# Altium PCB imu_analog.PcbDoc
Units mil, origin at the board's own origin, x right, y up, seen from the top; angles counter-clockwise.
Board outline 2000 x 2000 mil, 2 copper layers (Top Layer, Bottom Layer); 144 components, 100 nets, 489 pads, 36 vias.
Unrouted connection lines stored in the file: 322.
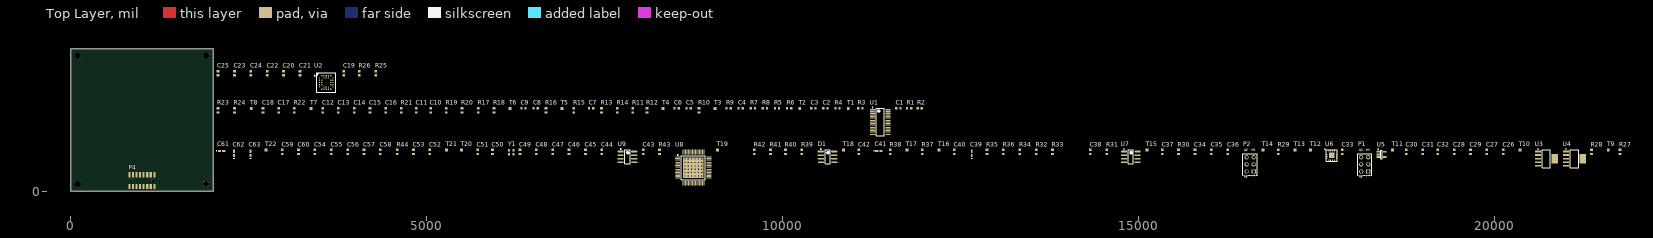
[diagram p0: Top Layer view]
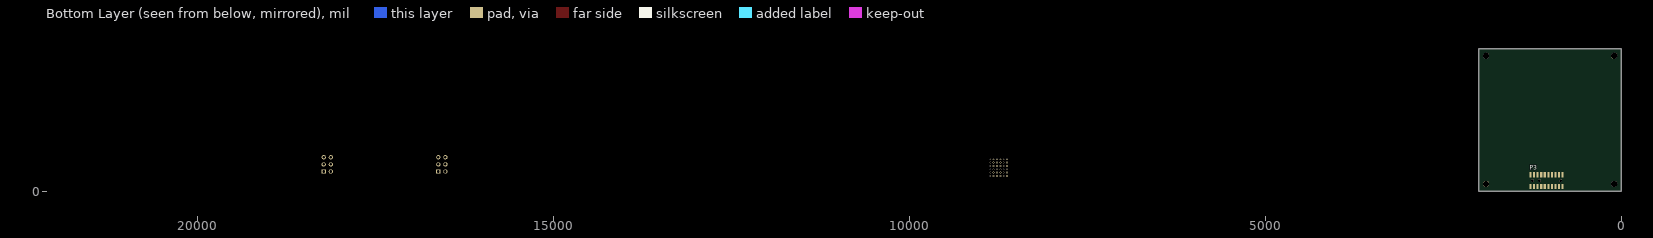
[diagram p1: Bottom Layer view, seen from below]

## Layer stack, top to bottom
Top Layer: signal copper 1.4
Dielectric: dielectric 12.6, FR-4, Dk 4.8
Bottom Layer: signal copper 1.4

## Board outline
0,0 2000,0 2000,2000 0,2000

## Design rules (kind name [scope] priority, off if disabled: settings)
Clearance [All] p1: gap=10
PolygonConnect [All] p1: connectstyle=Relief reliefconductorwidth=10 reliefentries=4 polygonreliefangle="90 Angle"
RoomDefinition U_gyro [InComponentClass('U_gyro')] p1: confinementstyle=ConfineIn formatcopy=TRUE lockcomponents=FALSE outline 2045,1340 4455,1340 4455,1810 2045,1810
RoomDefinition U_differential_op_amps [InComponentClass('U_differential_op_amps')] p2: confinementstyle=ConfineIn formatcopy=TRUE lockcomponents=FALSE outline 2045,760 12005,760 12005,1290 2045,1290
RoomDefinition imu_analog [InComponentClass('imu_analog')] p3: confinementstyle=ConfineIn formatcopy=TRUE lockcomponents=FALSE outline 2045,55 21930,55 21930,705 2045,705
RoutingVias [All] p1: holewidth=28 width=50 viastyle="Through Hole" minholewidth=28 minwidth=50 maxholewidth=28 maxwidth=50
SilkscreenOverComponentPads [All] p1: minsilkscreentomaskgap=10
SolderMaskExpansion [All] p1: expansion=4
Width [All] p1: maxlimit=10 minlimit=10 preferedwidth=10
27 further rules are at their usual default settings.

## Classes and differential pairs
net class FLTR_P_D[1..2]: FLTR_P_D1 FLTR_P_D2
net class FLTR_P_C[1..2]: FLTR_P_C1 FLTR_P_C2
net class FLTR_P_B[1..2]: FLTR_P_B1 FLTR_P_B2
net class FLTR_P_A[1..2]: FLTR_P_A1 FLTR_P_A2
net class FLTR_N_D[1..2]: FLTR_N_D1 FLTR_N_D2
net class FLTR_N_C[1..2]: FLTR_N_C1 FLTR_N_C2
net class FLTR_N_B[1..2]: FLTR_N_B1 FLTR_N_B2
net class FLTR_N_A[1..2]: FLTR_N_A1 FLTR_N_A2
net class FLTR_IN_D[1..2]: FLTR_IN_D1 FLTR_IN_D2
net class FLTR_IN_C[1..2]: FLTR_IN_C1 FLTR_IN_C2
net class FLTR_IN_B[1..2]: FLTR_IN_B1 FLTR_IN_B2
net class FLTR_IN_A[1..2]: FLTR_IN_A1 FLTR_IN_A2
component class U_gyro: C19 C20 C21 C22 C23 C24 C25 R25 R26 U2
component class U_differential_op_amps: C1 C2 C3 C4 C5 C6 C7 C8 C9 C10 C11 C12 C13 C14 C15 C16 C17 C18 R1 R2 R3 R4 R5 R6 R7 R8 R9 R10 R11 R12 R13 R14 R15 R16 R17 R18 R19 R20 R21 R22 R23 R24 T1 T2 T3 T4 T5 T6 T7 T8 U1
component class imu_analog: C26 C27 C28 C29 C30 C31 C32 C33 C34 C35 C36 C37 C38 C39 C40 C41 C42 C43 C44 C45 C46 C47 C48 C49 C50 C51 C52 C53 C54 C55 C56 C57 C58 C59 C60 C61 C62 C63 D1 P1 P2 P3 P4 R27 R28 R29 R30 R31 R32 R33 R34 R35 R36 R37 R38 R39 R40 R41 R42 R43 R44 T9 T10 T11 T12 T13 T14 T15 T16 T17 T18 T19 T20 T21 T22 U3 U4 U5 U6 U7 U8 U9 Y1

## Components (designator, comment, footprint, x,y, rotation, side; value= is the part's Value field where it differs from the comment)
C1 "Capacitor" "0603 (1608)" 11625,1165 r0 top
C2 "Capacitor" "0603 (1608)" 10600,1165 r0 top
C3 "Capacitor" "0603 (1608)" 10430,1165 r0 top
C4 "Capacitor" "0603 (1608)" 9410,1165 r0 top
C5 "Capacitor" "0603 (1608)" 8680,1165 r0 top
C6 "Capacitor" "0603 (1608)" 8510,1165 r0 top
C7 "Capacitor" "0603 (1608)" 7310,1165 r0 top
C8 "Capacitor" "0603 (1608)" 6530,1165 r0 top
C9 "Capacitor" "0603 (1608)" 6360,1165 r0 top
C10 "Capacitor" "0603 (1608)" 5055,1135 r90 top
C11 "Capacitor" "0603 (1608)" 4855,1135 r90 top
C12 "Capacitor" "0603 (1608)" 3540,1135 r90 top
C13 "Capacitor" "0603 (1608)" 3760,1135 r90 top
C14 "Capacitor" "0603 (1608)" 3985,1135 r90 top
C15 "Capacitor" "0603 (1608)" 4205,1135 r90 top
C16 "Capacitor" "0603 (1608)" 4425,1135 r90 top
C17 "Capacitor" "0603 (1608)" 2920,1135 r90 top
C18 "Capacitor" "0603 (1608)" 2700,1135 r90 top
C19 "Capacitor" "0603 (1608)" 3835,1655 r90 top
C20 "Capacitor" "0603 (1608)" 2990,1655 r90 top
C21 "Capacitor" "0603 (1608)" 3220,1655 r90 top
C22 "Capacitor" "0603 (1608)" 2760,1655 r90 top
C23 "Capacitor" "0603 (1608)" 2300,1655 r90 top
C24 "Capacitor" "0603 (1608)" 2530,1655 r90 top
C25 "Capacitor" "0603 (1608)" 2070,1655 r90 top
C26 "1uF" "0603 (1608)" 20120,550 r90 top
C27 "Capacitor" "0603 (1608)" 19890,550 r90 top
C28 "10uF" "0603 (1608)" 19430,550 r90 top
C29 "10uF" "0603 (1608)" 19660,550 r90 top
C30 "1uF" "0603 (1608)" 18760,550 r90 top
C31 "Capacitor" "0603 (1608)" 18990,550 r90 top
C32 "Capacitor" "0603 (1608)" 19200,550 r90 top
C33 "Capacitor" "0603 (1608)" 17860,550 r90 top
C34 "10nF" "0603 (1608)" 15790,550 r90 top
C35 "10nF" "0603 (1608)" 16020,550 r90 top
C36 "10nF" "0603 (1608)" 16250,550 r90 top
C37 "Capacitor" "0603 (1608)" 15330,550 r90 top
C38 "10nF" "0603 (1608)" 14320,550 r90 top
C39 "tant" "CAP-POL 0603(1608)" 12655,530 r90 top
C40 "Capacitor" "0603 (1608)" 12410,550 r90 top
C41 "tant" "CAP-POL 0603(1608)" 11350,565 r0 top
C42 "Capacitor" "0603 (1608)" 11070,550 r90 top
C43 "10nF" "0603 (1608)" 8040,550 r90 top
C44 "Capacitor" "0603 (1608)" 7460,550 r90 top
C45 "Capacitor" "0603 (1608)" 7230,550 r90 top
C46 "Capacitor" "0603 (1608)" 7000,550 r90 top
C47 "Capacitor" "0603 (1608)" 6770,550 r90 top
C48 "Capacitor" "0603 (1608)" 6540,550 r90 top
C49 "Capacitor" "0603 (1608)" 6310,550 r90 top
C50 "Capacitor" "0603 (1608)" 5925,550 r90 top
C51 "Capacitor" "0603 (1608)" 5715,550 r90 top
C52 "Capacitor" "0603 (1608)" 5045,550 r90 top
C53 "10nF" "0603 (1608)" 4815,550 r90 top
C54 "Capacitor" "0603 (1608)" 3430,550 r90 top
C55 "Capacitor" "0603 (1608)" 3660,550 r90 top
C56 "Capacitor" "0603 (1608)" 3890,550 r90 top
C57 "Capacitor" "0603 (1608)" 4120,550 r90 top
C58 "Capacitor" "0603 (1608)" 4350,550 r90 top
C59 "Capacitor" "0603 (1608)" 2970,550 r90 top
C60 "Capacitor" "0603 (1608)" 3200,550 r90 top
C61 "tant" "CAP-POL 0603(1608)" 2120,565 r0 top
C62 "tant" "CAP-POL 0603(1608)" 2295,530 r90 top
C63 "tant" "CAP-POL 0603(1608)" 2525,530 r90 top
D1 "2.5V Ref" SOIC-8 10630,480 r0 top
P1 "Header 3X2A" HDR2X3_CEN 18225,275 r90 top
P2 "Header 3X2A" HDR2X3_CEN 16615,275 r90 top
P3 "MHDR2X10" S9013E-10-ND 1050,147 r0 bottom locked
P4 "2x8smd0.5male" S9007E-08-ND 1000,147 r0 top locked
R1 "931 1%" "0603 (1608)" 11775,1165 r0 top
R2 "931 1%" "0603 (1608)" 11925,1165 r0 top
R3 "931 1%" "0603 (1608)" 11090,1165 r0 top
R4 "931 1%" "0603 (1608)" 10770,1165 r0 top
R5 "931 1%" "0603 (1608)" 9920,1165 r0 top
R6 "931 1%" "0603 (1608)" 10090,1165 r0 top
R7 "931 1%" "0603 (1608)" 9580,1165 r0 top
R8 "931 1%" "0603 (1608)" 9750,1165 r0 top
R9 "931 1%" "0603 (1608)" 9240,1165 r0 top
R10 "931 1%" "0603 (1608)" 8825,1135 r90 top
R11 "931 1%" "0603 (1608)" 7895,1135 r90 top
R12 "931 1%" "0603 (1608)" 8095,1135 r90 top
R13 "931 1%" "0603 (1608)" 7455,1135 r90 top
R14 "931 1%" "0603 (1608)" 7675,1135 r90 top
R15 "931 1%" "0603 (1608)" 7065,1135 r90 top
R16 "931 1%" "0603 (1608)" 6675,1135 r90 top
R17 "931 1%" "0603 (1608)" 5725,1135 r90 top
R18 "931 1%" "0603 (1608)" 5945,1135 r90 top
R19 "931 1%" "0603 (1608)" 5275,1135 r90 top
R20 "931 1%" "0603 (1608)" 5495,1135 r90 top
R21 "931 1%" "0603 (1608)" 4645,1135 r90 top
R22 "931 1%" "0603 (1608)" 3140,1135 r90 top
R23 "931 1%" "0603 (1608)" 2070,1135 r90 top
R24 "931 1%" "0603 (1608)" 2300,1135 r90 top
R25 "ST Jumper" "0603 (1608)" 4285,1655 r90 top
R26 "ST Jumper" "0603 (1608)" 4055,1655 r90 top
R27 "1K" "0603 (1608)" 21760,550 r90 top
R28 "20K" "0603 (1608)" 21360,550 r90 top
R29 "ST Jumper" "0603 (1608)" 16960,550 r90 top
R30 "1K" "0603 (1608)" 15560,550 r90 top
R31 "20K" "0603 (1608)" 14550,550 r90 top
R32 "100" "0603 (1608)" 13560,550 r90 top
R33 "Res1" "0603 (1608)" 13790,550 r90 top
R34 "1K" "0603 (1608)" 13330,550 r90 top
R35 "100" "0603 (1608)" 12870,550 r90 top
R36 "Res1" "0603 (1608)" 13100,550 r90 top
R37 "Res1" "0603 (1608)" 11960,550 r90 top
R38 "Res1" "0603 (1608)" 11510,550 r90 top
R39 "Res1" "0603 (1608)" 10270,550 r90 top
R40 "Res1" "0603 (1608)" 10040,550 r90 top
R41 "Res1" "0603 (1608)" 9830,550 r90 top
R42 "Res1" "0603 (1608)" 9600,550 r90 top
R43 "100" "0603 (1608)" 8270,550 r90 top
R44 "931 1%" "0603 (1608)" 4585,550 r90 top
T1 "" TEST_PAD 10920,1160 r0 top
T2 "" TEST_PAD 10240,1160 r0 top
T3 "" TEST_PAD 9050,1160 r0 top
T4 "" TEST_PAD 8320,1160 r0 top
T5 "" TEST_PAD 6900,1160 r0 top
T6 "" TEST_PAD 6170,1160 r0 top
T7 "" TEST_PAD 3375,1160 r0 top
T8 "" TEST_PAD 2535,1160 r0 top
T9 "TEST_PAD" TEST_PAD 21595,575 r0 top
T10 "TEST_PAD" TEST_PAD 20355,575 r90 top
T11 "TEST_PAD" TEST_PAD 18565,575 r90 top
T12 "" TEST_PAD 17415,575 r90 top
T13 "" TEST_PAD 17195,575 r90 top
T14 "" TEST_PAD 16745,575 r90 top
T15 "" TEST_PAD 15115,575 r90 top
T16 "" TEST_PAD 12195,575 r90 top
T17 "" TEST_PAD 11745,575 r90 top
T18 "" TEST_PAD 10855,575 r90 top
T19 "" TEST_PAD 9085,575 r90 top
T20 "" TEST_PAD 5490,575 r90 top
T21 "" TEST_PAD 5280,575 r90 top
T22 "TEST_PAD" TEST_PAD 2745,575 r90 top
U1 "THS4524" TSSOP-38 11370,970 r0 top
U2 "ADXRS620" BGA_AXDR 3590,1525 r0 top
U3 "3.3V Reg MCP1791T-3302E" "SOT223 - 5 leads + tab" 20725,455 r0 top
U4 "5V Reg - MCP1791T-5002E" "SOT223 - 5 leads + tab" 21120,455 r0 top
U5 "1.8V Reg MCP1804" "SOT23-5 - MCP1804T" 18410,515 r0 top
U6 "ADXL325" LFCSP_LQ_AXDL 17710,500 r0 top
U7 "OPA350" MSOP-8 14890,480 r0 top
U8 "ADS1178/1278" S-PQFP-G64 8745,330 r0 top
U9 "OPA350" MSOP-8 7820,480 r0 top
Y1 "OSCILLATOR" "ABRACON Oscillator" 6155,515 r0 top

## Footprints (in the part's own frame and the unit in brackets; to place one, negate y for a bottom-side part, rotate by r counter-clockwise, add the part's x,y. Pads: shape width x height; smd on the part's side, far side on the other; paste and mask are expansions set on the pad)
"0603 (1608)" [mm] "Chip 2-Leads 0603 (1608)"
  rect 0.8x0.95 smd mask+0: 1(-0.75,0) 2(0.75,0)
  body extent -0.77,-0.43 0.77,0.43, height 0.55
"ABRACON Oscillator" [mm]
  rect 0.65x0.85 smd: 1(0,0) 2(1.65,0) 3(1.65,1.55) 4(0,1.55)
  body extent -0.48,-0.36 2.2,1.91, height 0.85
BGA_AXDR [mm] "From AXDRS622 Datasheet"
  round 0.45 smd: A2(-1.6,2.4) A3(-0.8,2.4) A4(0,2.4) A5(0.8,2.4) A6(1.6,2.4) B1(-2.4,1.6) B3(-0.8,1.6) B4(0,1.6) B5(0.8,1.6) B7(2.4,1.6) C1(-2.4,0.8) C2(-1.6,0.8) C6(1.6,0.8) C7(2.4,0.8) D1(-2.4,0) D2(-1.6,0) D6(1.6,0) D7(2.4,0) E1(-2.4,-0.8) E2(-1.6,-0.8) E6(1.6,-0.8) E7(2.4,-0.8) F1(-2.4,-1.6) F3(-0.8,-1.6) F4(0,-1.6) F5(0.8,-1.6) F7(2.4,-1.6) G2(-1.6,-2.4) G3(-0.8,-2.4) G4(0,-2.4) G5(0.8,-2.4) G6(1.6,-2.4)
  silkscreen extent -4.22,-3.45 3.45,3.45, body extent -3.45,-3.45 3.45,3.45, height 3.8
"CAP-POL 0603(1608)" [mm] "Molded Capacitor, 2-Leads, Body 1.6x0.8mm, IPC Medium Density"
  rect 1.2x0.65 smd: 1(-0.775,0) 2(0.775,0)
  silkscreen extent -1.68,-0.22 -1.68,0.23, body extent -0.85,-0.48 0.85,0.48, height 0.9
HDR2X3_CEN [mm] "Connector; Header; 3x2 Position"
  rect 1.5x1.5 hole 0.9: 1(0,0)
  round 1.5 hole 0.9: 2(2.54,0) 3(5.08,0) 4(0,2.54) 5(2.54,2.54) 6(5.08,2.54)
  silkscreen extent -1.27,-1.27 6.35,3.81
LFCSP_LQ_AXDL [mm]
  rect 0.5x0.35 smd mask+0.102: 1(-1.75,0.975) 2(-1.75,0.325) 3(-1.75,-0.325) 4(-1.75,-0.975) 9(1.75,-0.975) 10(1.75,-0.325) 11(1.75,0.325) 12(1.75,0.975)
  rect 0.35x0.5 smd mask+0.102: 5(-0.975,-1.75) 6(-0.325,-1.75) 7(0.325,-1.75) 8(0.975,-1.75) 13(0.975,1.75) 14(0.325,1.75) 15(-0.325,1.75) 16(-0.975,1.75)
  rect 1.95x1.95 smd: PAD(0,0)
  silkscreen extent -2.37,-2 2,2.37
MSOP-8 [mm] "MSOP-8 From OPA350 datasheet"
  oval 2.2x0.6 smd: 1(-2.425,1.905) 2(-2.425,0.635) 3(-2.425,-0.635) 4(-2.425,-1.905) 5(2.425,-1.905) 6(2.425,-0.635) 7(2.425,0.635) 8(2.425,1.905)
  silkscreen extent -2.55,-2.5 0.93,2.88, body extent -2,-2.5 2,2.5, height 1.75
S9007E-08-ND [mm] "16 0.05\" smd header - female"
  round 0.9 hole 0.9: 0(-3.81,0) 0(3.81,0)
  rect 0.74x1.85 smd: 1(-4.445,2.125) 2(-4.445,-2.125) 3(-3.175,2.125) 4(-3.175,-2.125) 5(-1.905,2.125) 6(-1.905,-2.125) 7(-0.635,2.125) 8(-0.635,-2.125) 9(0.635,2.125) 10(0.635,-2.125) 11(1.905,2.125) 12(1.905,-2.125) 13(3.175,2.125) 14(3.175,-2.125) 15(4.445,2.125) 16(4.445,-2.125)
S9013E-10-ND [mm] "20-POS Header SMD"
  round 0.9 hole 0.9: 0(-5.08,0) 0(5.08,0)
  rect 0.74x1.85 smd: 1(-5.715,2.125) 2(-5.715,-2.125) 3(-4.445,2.125) 4(-4.445,-2.125) 5(-3.175,2.125) 6(-3.175,-2.125) 7(-1.905,2.125) 8(-1.905,-2.125) 9(-0.635,2.125) 10(-0.635,-2.125) 11(0.635,2.125) 12(0.635,-2.125) 13(1.905,2.125) 14(1.905,-2.125) 15(3.175,2.125) 16(3.175,-2.125) 17(4.445,2.125) 18(4.445,-2.125) 19(5.715,2.125) 20(5.715,-2.125)
S-PQFP-G64 [mm] "ADS1178 Footprint"
  oval 1.75x0.3 smd: 1(-5.575,3.75) 2(-5.575,3.25) 3(-5.575,2.75) 4(-5.575,2.25) 5(-5.575,1.75) 6(-5.575,1.25) 7(-5.575,0.75) 8(-5.575,0.25) 9(-5.575,-0.25) 10(-5.575,-0.75) 11(-5.575,-1.25) 12(-5.575,-1.75) 13(-5.575,-2.25) 14(-5.575,-2.75) 15(-5.575,-3.25) 16(-5.575,-3.75) 33(5.575,-3.75) 34(5.575,-3.25) 35(5.575,-2.75) 36(5.575,-2.25) 37(5.575,-1.75) 38(5.575,-1.25) 39(5.575,-0.75) 40(5.575,-0.25) 41(5.575,0.25) 42(5.575,0.75) 43(5.575,1.25) 44(5.575,1.75) 45(5.575,2.25) 46(5.575,2.75) 47(5.575,3.25) 48(5.575,3.75)
  oval 0.3x1.75 smd: 17(-3.75,-5.575) 18(-3.25,-5.575) 19(-2.75,-5.575) 20(-2.25,-5.575) 21(-1.75,-5.575) 22(-1.25,-5.575) 23(-0.75,-5.575) 24(-0.25,-5.575) 25(0.25,-5.575) 26(0.75,-5.575) 27(1.25,-5.575) 28(1.75,-5.575) 29(2.25,-5.575) 30(2.75,-5.575) 31(3.25,-5.575) 32(3.75,-5.575) 49(3.75,5.575) 50(3.25,5.575) 51(2.75,5.575) 52(2.25,5.575) 53(1.75,5.575) 54(1.25,5.575) 55(0.75,5.575) 56(0.25,5.575) 57(-0.25,5.575) 58(-0.75,5.575) 59(-1.25,5.575) 60(-1.75,5.575) 61(-2.25,5.575) 62(-2.75,5.575) 63(-3.25,5.575) 64(-3.75,5.575)
  rect 7.3x7.3 smd: 65(0,0)
  silkscreen extent -5.7,-4.3 4.3,4.57, body extent -5,-5 5,5, height 1.2
SOIC-8 [mm] "SOIC, 8-Leads, Body 5.0x4.0mm (max), Pitch 1.27mm, IPC Medium Density"
  oval 2.2x0.6 smd: 1(-2.4,1.905) 2(-2.4,0.635) 3(-2.4,-0.635) 4(-2.4,-1.905) 5(2.4,-1.905) 6(2.4,-0.635) 7(2.4,0.635) 8(2.4,1.905)
  silkscreen extent -2.52,-2.5 0.9,2.88, body extent -2,-2.5 2,2.5, height 1.75
"SOT23-5 - MCP1804T" [mm] "SOT23, 5-Leads, Body 3.1x3.2mm (max), Pitch 0.95mm, IPC Medium Density"
  rect 1.15x0.6 smd: 1(-1.175,0.95) 2(-1.175,0) 3(-1.175,-0.95) 4(1.175,-0.95) 5(1.175,0.95)
  silkscreen extent -1.3,-1.55 0.2,1.92, body extent -0.9,-1.55 0.9,1.55, height 1.45
"SOT223 - 5 leads + tab" [mm] "MCP1791T-5002E/DCCT-ND Body 6.6x7.3mm (max), Pitch 1.27mm, IPC Medium Density"
  rect 2.2x0.65 smd: 1(-3,2.54) 2(-3,1.27) 3(-3,0) 4(-3,-1.27) 5(-3,-2.54)
  rect 2.2x3.3 smd: 6(3,0)
  silkscreen extent -3.12,-3.27 1.5,3.54, body extent -1.78,-3.27 1.78,3.27, height 1.8
TEST_PAD [mm]
  rect 1x1 smd: 0(0,0)
TSSOP-38 [mm] "THS4524"
  oval 1.75x0.3 smd: 1(-2.775,4.5) 2(-2.775,4) 3(-2.775,3.5) 4(-2.775,3) 5(-2.775,2.5) 6(-2.775,2) 7(-2.775,1.5) 8(-2.775,1) 9(-2.775,0.5) 10(-2.775,0) 11(-2.775,-0.5) 12(-2.775,-1) 13(-2.775,-1.5) 14(-2.775,-2) 15(-2.775,-2.5) 16(-2.775,-3) 17(-2.775,-3.5) 18(-2.775,-4) 19(-2.775,-4.5) 20(2.775,-4.5) 21(2.775,-4) 22(2.775,-3.5) 23(2.775,-3) 24(2.775,-2.5) 25(2.775,-2) 26(2.775,-1.5) 27(2.775,-1) 28(2.775,-0.5) 29(2.775,0) 30(2.775,0.5) 31(2.775,1) 32(2.775,1.5) 33(2.775,2) 34(2.775,2.5) 35(2.775,3) 36(2.775,3.5) 37(2.775,4) 38(2.775,4.5)
  silkscreen extent -2.9,-4.9 1.5,5.32, body extent -2.15,-4.9 2.15,4.9, height 1.2

## Part data
C26 C28 C29 C30 C34 C35 C36 C38 C43 C53: library part Capacitor
C39 C41 C61 C62 C63: library part "Cap Pol3", "Polarized Capacitor (Surface Mount)"
C45 C46 C47 C48 C49 C50 C51 C52: "COG Ceramic Cap -> near input to ads1178"
D1: library part ZENER, "REF1004 - 2.5 volt ref"
P1 P2: "Header, 3-Pin, Dual row"
P3: "Header, 10-Pin, Female"
R1 R2 R3 R4 R5 R6 R7 R8 R9 R10 R11 R12 R13 R14 R15 R16 R17 R18 R19 R20 R21 R22 R23 R24 R25 R26 R27 R28 R29 R30 R31 R32 R34 R35 R43 R44: library part Res1, "Resistor"
R33 R36 R37 R38 R39 R40 R41 R42: "Resistor"
T1 T2 T3 T4 T5 T6 T7 T8 T12 T13 T14 T15 T16 T17 T18 T19 T20 T21: library part TEST_PAD
U3: library part "5V Reg - MCP1791T-5002E/DC", "3.3V, 70mA LDO with SHDN and PWRGD pins"
U4: library part "5V Reg - MCP1791T-5002E/DC", "5V, 70mA LDO with SHDN and PWRGD pins"
U5: library part "1.8V Reg", "1.8V Reg. MCP1804"
U8: library part ADS1178, "The ADS1178 and 1278 are pin compatible. 16 and 24 bits, respectively."

## Free pads (board coordinates)
  round 86 hole 86: 0(100,100) 1(1900,100) 2(1900,1900) 3(100,1900)

## Via types
v1: diameter 25.98, hole 12.99, Top Layer to Bottom Layer, tented top, 36 vias

## Nets (pads, with @x,y where several pads share a name; then routed paths per layer and width w, separated by ;. In a path a pad name is that pad's centre, name@x,y a point inside that pad or via, vN(x,y) a via of type N, cw(c..) or ccw(c..) an arc to the next point about the centre after c; other vN are vias at no path point)
1.8V: C26.1 C58.1 C63.1 T11.0 U5.5 U8.26
3.3V: C28.1 C33.1 C53.2 C59.1 C60.1 C61.1 R28.1 R29.1 U3.4 U6.14 U6.15 U8.22 U8.23 U8.32 U8.34 U8.35 U8.36 U8.37 U8.38 U8.39 U8.40 U8.41 U8.42 Y1.1 Y1.4
5V: C11.1 C12.1 C13.1 C14.1 C15.1 C16.1 C19.1 C20.1 C22.1 C29.1 C38.2 C43.2 C54.1 C55.1 C56.1 C57.1 C62.1 P1.2 P2.2 R25.2 R26.2 R31.2 U1.20 U1.25 U1.30 U1.35 U2.A3 U2.E1 U2.E7 U4.4 U7.7 U8.5 U8.44 U8.53 U8.60 U9.7
ADC_DRDY: P3.17 T21.0 U8.29
ADC_SYNC: P3.19 T20.0 U8.11
AGND: C2.1 C5.1 C8.1 C11.2 C12.2 C13.2 C14.2 C15.2 C16.2 C17.1 C19.2 C20.2 C22.2 C25.2 C27.2 C28.2 C31.2 C33.2 C34.1 C35.1 C36.1 C38.1 C39.2 C40.2 C41.2 C42.2 C43.1 C44.2 C54.2 C55.2 C56.2 C57.2 C62.2 D1.4 P1.3 P2.3 R5.1 R11.1 R17.1 R23.1 U1.5 U1.10 U1.15 U1.23 U1.24 U1.28 U1.29 U1.33 U1.34 U1.38 U2.F7 U2.G2 U3.3 U3.6 U6.3 U6.5 U6.6 U6.7 U7.4 U8.6 U8.43 U8.54 U8.57 U8.58 U8.59 U9.4
CLK_A: P3.20 U8.28
DGND: C26.2 C30.2 C53.1 C58.2 C59.2 C60.2 C61.2 C63.2 U5.2 U8.7 U8.8 U8.9 U8.10 U8.21 U8.24 U8.25 U8.30 U8.31 Y1.2
EN_SIG: P3.7 P4.8
FLTR_IN_A: R1.1
FLTR_IN_A1: C36.2 T12.0 U6.12
FLTR_IN_A2: T15.0 U2.G3
FLTR_IN_B: R7.1
FLTR_IN_B1: C35.2 T13.0 U6.10
FLTR_IN_B2: C21.2 T16.0 U2.B1
FLTR_IN_C: R13.1
FLTR_IN_C1: C34.2 T14.0 U6.8
FLTR_IN_C2: P2.5
FLTR_IN_D: R19.1
FLTR_IN_D1: P1.6
FLTR_IN_D2: P2.6
FLTR_N_A: R2.2 R3.2 T1.0
FLTR_N_A1: C45.2 U8.4
FLTR_N_A2: C49.2 U8.52
FLTR_N_B: R8.2 R9.2 T3.0
FLTR_N_B1: C46.2 U8.2
FLTR_N_B2: C50.2 U8.50
FLTR_N_C: R14.2 R15.2 T5.0
FLTR_N_C1: C47.2 U8.64
FLTR_N_C2: C51.2 U8.48
FLTR_N_D: R20.2 R21.2 T7.0
FLTR_N_D1: C48.2 U8.62
FLTR_N_D2: C52.2 U8.46
FLTR_P_A: R4.2 R6.2 T2.0
FLTR_P_A1: C45.1 U8.3
FLTR_P_A2: C49.1 U8.51
FLTR_P_B: R10.2 R12.2 T4.0
FLTR_P_B1: C46.1 U8.1
FLTR_P_B2: C50.1 U8.49
FLTR_P_C: R16.2 R18.2 T6.0
FLTR_P_C1: C47.1 U8.63
FLTR_P_C2: C51.1 U8.47
FLTR_P_D: R22.2 R24.2 T8.0
FLTR_P_D1: C48.1 U8.61
FLTR_P_D2: C52.1 U8.45
MISO: P3.3 P4.4
MISO_A: P3.18 R44.2 T22.0
MOSI: P3.1 P4.2
NetC1_1: C1.1 R3.1 U1.37
NetC1_2: C1.2 R1.2 R2.1 U1.2
NetC3_1: C3.1 R4.1 U1.36
NetC3_2: C3.2 R5.2 R6.1 U1.3
NetC4_1: C4.1 R9.1 U1.32
NetC4_2: C4.2 R7.2 R8.1 U1.7
NetC6_1: C6.1 R10.1 U1.31
NetC6_2: C6.2 R11.2 R12.1 U1.8
NetC7_1: C7.1 R15.1 U1.27
NetC7_2: C7.2 R13.2 R14.1 U1.12
NetC9_1: C9.1 R16.1 U1.26
NetC9_2: C9.2 R17.2 R18.1 U1.13
NetC10_1: C10.1 R21.1 U1.22
NetC10_2: C10.2 R19.2 R20.1 U1.17
NetC18_1: C18.1 R22.1 U1.21
NetC18_2: C18.2 R23.2 R24.1 U1.18
NetC21_1: C21.1 U2.C1
NetC23_1: C23.1 U2.A6
NetC23_2: C23.2 U2.C7
NetC24_1: C24.1 U2.A4
NetC24_2: C24.2 U2.A5
NetC25_1: C25.1 U2.D7
NetC27_1: C27.1 R27.2 T10.0 U3.1
NetC37_1: C37.1 R30.1 U7.2
NetC37_2: C37.2 R32.1 U7.6
NetC41_1: C41.1 C42.1 R34.2 R35.1
NetC44_1: C44.1 U8.55 U9.3
NetD1_6: D1.6 R31.1
NetD1_8: D1.8 R34.1
NetP3_2: P3.2 P4.1 R33.1
NetP3_4: P3.4 P4.3 R36.1
NetP3_6: P3.6 P4.5 R37.1
NetP3_8: P3.8 P4.7 R38.1
NetP3_10: P3.10 P4.9 R39.1
NetP3_12: P3.12 P4.11 R40.1
NetP3_14: P3.14 P4.13 R41.1
NetP3_16: P3.16 P4.15 R42.1
NetR25_1: R25.1 U2.G4
NetR26_1: R26.1 U2.G5
NetR28_2: R28.2 T9.0 U3.5 U4.1
NetR29_2: R29.2 U6.2
NetR35_2: R35.2 T18.0 U7.3
NetR43_1: R43.1 U9.6
NetR44_1: R44.1 U8.20
NetU8_27: U8.27 Y1.3
PWR_EN: P3.9 R27.1 U5.4
SCK: P3.5 P4.6
SS: R33.2 R36.2 R37.2 R38.2 R39.2 R40.2 R41.2 R42.2
VBAT: C30.1 C31.1 C32.1 P3.13 P4.14 U3.2 U4.2 U5.1
VGND: C29.2 C32.2 P3.15 P4.16 U4.3 U4.6
VOCM: C2.2 C5.2 C8.2 C17.2 R43.2 T19.0 U1.4 U1.9 U1.14 U1.19 U9.2
VREFP: C39.1 C40.1 R30.2 R32.2 T17.0 U8.56
pads on no net: D1.1 D1.2 D1.3 D1.5 D1.7 P1.1 P1.4 P1.5 P2.1 P2.4 P3.0 P3.11 P4.0 P4.10 P4.12 U1.1 U1.6 U1.11 U1.16 U2.A2 U2.B3 U2.B4 U2.B5 U2.B7 U2.C2 U2.C6 U2.D1 U2.D2 U2.D6 U2.E2 U2.E6 U2.F1 U2.F3 U2.F4 U2.F5 U2.G6 U4.5 U5.3 U6.1 U6.4 U6.9 U6.11 U6.13 U6.16 U6.PAD U7.1 U7.5 U7.8 U8.12 U8.13 U8.14 U8.15 U8.16 U8.17 U8.18 U8.19 U8.33 U8.65 U9.1 U9.5 U9.8
copper on no net:
  other v1: 8626.89,211.89 8674.13,211.89 8721.38,211.89 8768.62,211.89 8815.87,211.89 8863.11,211.89 8626.89,259.13 8674.13,259.13 8721.38,259.13 8768.62,259.13 8815.87,259.13 8863.11,259.13 8626.89,306.38 8674.13,306.38 8721.38,306.38 8768.62,306.38 8815.87,306.38 8863.11,306.38 8626.89,353.62 8674.13,353.62 8721.38,353.62 8768.62,353.62 8815.87,353.62 8863.11,353.62 8626.89,400.87 8674.13,400.87 8721.38,400.87 8768.62,400.87 8815.87,400.87 8863.11,400.87 8626.89,448.11 8674.13,448.11 8721.38,448.11 8768.62,448.11 8815.87,448.11 8863.11,448.11

## Text inside footprints (layer, text, board x,y; h text height)
P1: Top Overlay "4" at 18145,175 h50 r90; Top Overlay "1" at 18245,195 h50 r90; Top Overlay "3" at 18245,555 h50 r90; Top Overlay "6" at 18145,555 h50 r90
P2: Top Overlay "4" at 16535,175 h50 r90; Top Overlay "1" at 16635,195 h50 r90; Top Overlay "3" at 16635,555 h50 r90; Top Overlay "6" at 16535,555 h50 r90